# EAGLE board MBO (EAGLE 7.4.0)
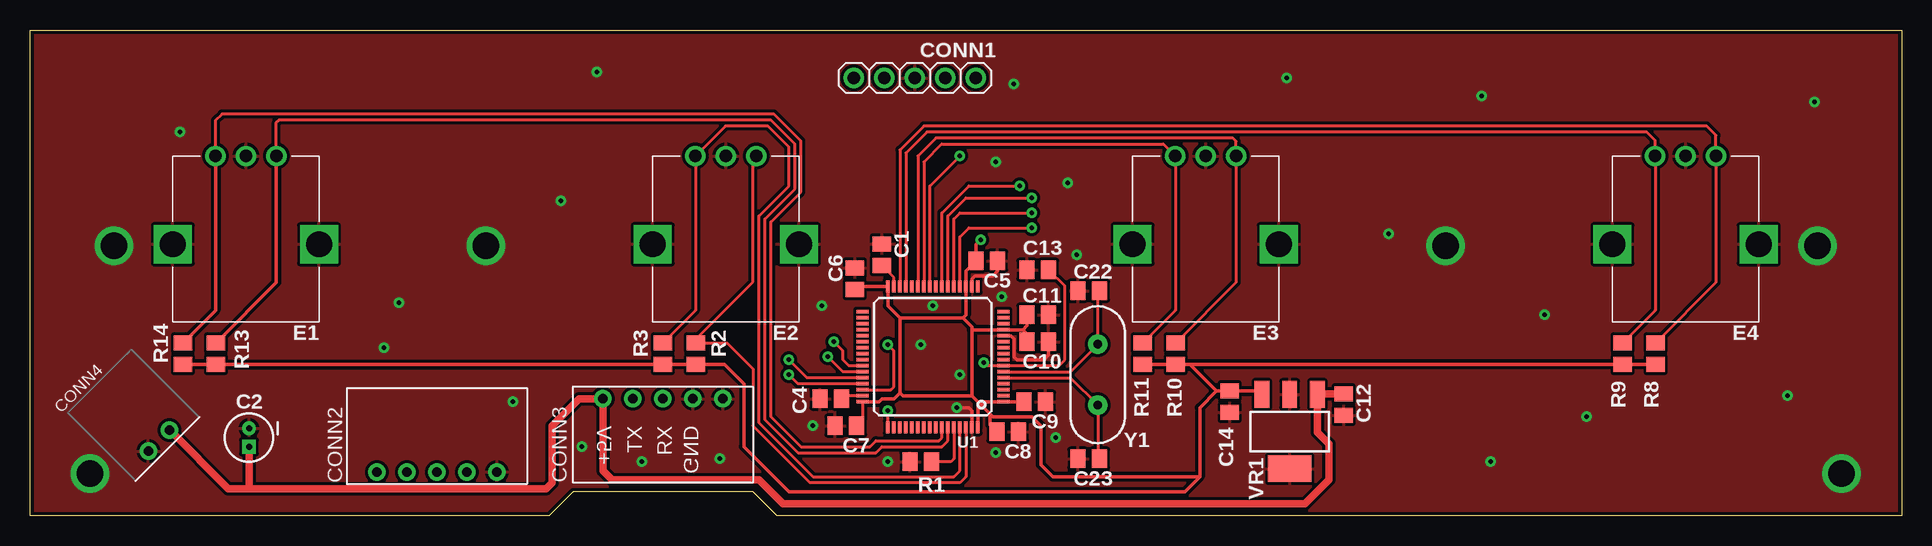
[diagram p0: board, top side]
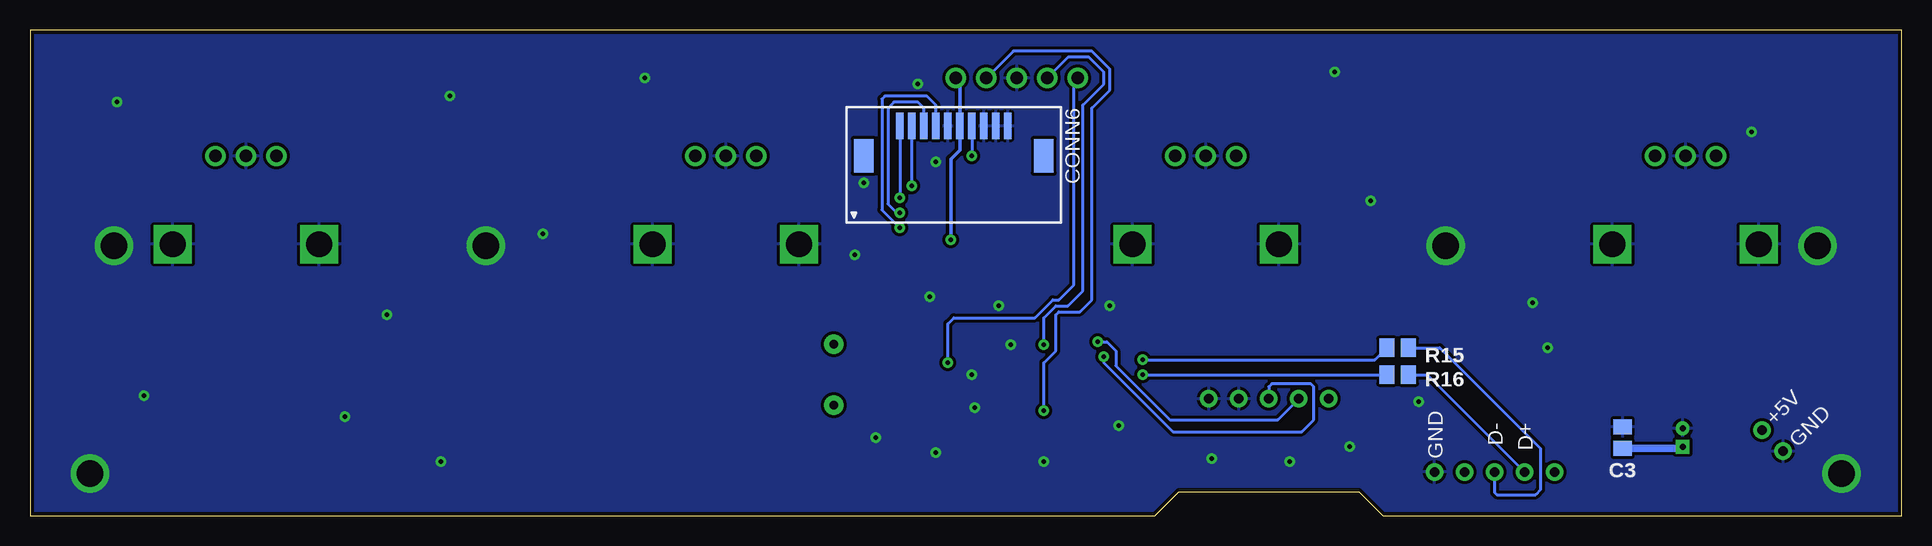
[diagram p1: board, bottom side, seen from below]

Size 156 x 40.5 mm. Coordinates in mm from the lower left corner, seen from the top.
Outline: 156,0 62.25,0 60.25,2 45.25,2 43.25,0 0,0 0,40.5 156,40.5 156,0
Copper layers (1*16): Top 0.035mm / dielectric 1.5mm / Bottom 0.035mm
Design rules "smiery *": minimum track width 8mil, minimum drill 12mil, track to track 7mil, track to pad 5mil, pad to pad 5mil, via to via 6mil, smd to smd 0mil, copper to edge 12mil, drill to drill 10mil, minimum pad ring 13mil, minimum via ring 10mil, stop-mask expansion 2mil, vias tented up to drill 25mil, thermal gap 10mil
Net classes: 0 default: width 0.203 mm; 1 vcc: width 0.254 mm

## Footprints (pad centres in the part's own frame; a part is rotated, then mirrored left to right if it is on the bottom)
C0805 = smd 1.27 x 1.524: 1 -0.9,0; 2 0.9,0
C-TH-E-0401 = drill 0.5 square: + 0.77,0 | drill 0.5: - -0.77,0
1X05-2.54 = drill 1.016: 1 -5.08,0; 2 -2.54,0; 3 0,0; 4 2.54,0; 5 5.08,0
JST-XH-05P-H = drill 0.8: 1 -5,0; 2 -2.5,0; 3 0,0; 4 2.5,0; 5 5,0
JST-XH-02P-H = drill 0.8: 1 -1.25,0; 2 1.25,0
MOLEX-52271-1079 = smd 0.6 x 2.2: 1 -4.5,3.5; 2 -3.5,3.5; 3 -2.5,3.5; 4 -1.5,3.5; 5 -0.5,3.5; 6 0.5,3.5; 7 1.5,3.5; 8 2.5,3.5; 9 3.5,3.5; 10 4.5,3.5 | smd 1.65 x 2.8: S1 -7.5,1; S2 7.5,1
EC12E-1 = drill 1.016: A -2.54,-7.493; B 2.54,-7.493; C 0,-7.493 | drill 2.159 square: S1 -6.096,-0.127; S2 6.096,-0.127
R0805 = smd 1.27 x 1.524: 1 -0.9,0; 2 0.9,0
TQFP-64-10X10-HS = smd 1 x 0.3: 1 -5.875,3.75; 2 -5.875,3.25; 3 -5.875,2.75; 4 -5.875,2.25; 5 -5.875,1.75; 6 -5.875,1.25; 7 -5.875,0.75; 8 -5.875,0.25; 9 -5.875,-0.25; 10 -5.875,-0.75; 11 -5.875,-1.25; 12 -5.875,-1.75; 13 -5.875,-2.25; 14 -5.875,-2.75; 15 -5.875,-3.25; 16 -5.875,-3.75; 33 5.875,-3.75; 34 5.875,-3.25; 35 5.875,-2.75; 36 5.875,-2.25; 37 5.875,-1.75; 38 5.875,-1.25; 39 5.875,-0.75; 40 5.875,-0.25; 41 5.875,0.25; 42 5.875,0.75; 43 5.875,1.25; 44 5.875,1.75; 45 5.875,2.25; 46 5.875,2.75; 47 5.875,3.25; 48 5.875,3.75 | smd 0.3 x 1: 17 -3.75,-5.875; 18 -3.25,-5.875; 19 -2.75,-5.875; 20 -2.25,-5.875; 21 -1.75,-5.875; 22 -1.25,-5.875; 23 -0.75,-5.875; 24 -0.25,-5.875; 25 0.25,-5.875; 26 0.75,-5.875; 27 1.25,-5.875; 28 1.75,-5.875; 29 2.25,-5.875; 30 2.75,-5.875; 31 3.25,-5.875; 32 3.75,-5.875; 49 3.75,5.875; 50 3.25,5.875; 51 2.75,5.875; 52 2.25,5.875; 53 1.75,5.875; 54 1.25,5.875; 55 0.75,5.875; 56 0.25,5.875; 57 -0.25,5.875; 58 -0.75,5.875; 59 -1.25,5.875; 60 -1.75,5.875; 61 -2.25,5.875; 62 -2.75,5.875; 63 -3.25,5.875; 64 -3.75,5.875
SOT223 = smd 2.235 x 1.219: 1 -3.099,2.311; 2 -3.099,0; 3 -3.099,-2.311 | smd 2.2 x 3.6: 4 3.099,0
HC49US = drill 0.7 pad 1.651: 1 -2.54,0; 2 2.54,0

## Placement (x,y rotation side)
C1  2.2u  [C0805]  71,21.75 270 top
C2  10u  [C-TH-E-0401]  18.25,6.5 270 top
C3  100n  [C0805]  23.25,6.5 90 bottom
C4  2.2u  [C0805]  66.75,9.75 180 top
C5  100n  [C0805]  79.75,21.25 0 top
C6  100n  [C0805]  68.75,19.75 90 top
C7  100n  [C0805]  68,7.5 180 top
C8  100n  [C0805]  81.5,7 0 top
C9  100n  [C0805]  83.75,9.5 0 top
C10  1u  [C0805]  84,14.5 0 top
C11  100n  [C0805]  84,16.75 0 top
C12  4.7u  [C0805]  109.5,9.25 270 top
C13  100n  [C0805]  84,20.5 180 top
C14  4.7u  [C0805]  100,9.5 270 top
C22  18p  [C0805]  88.25,18.75 180 top
C23  18p  [C0805]  88.25,4.75 0 top
CONN1  PINHD-1X05-TH-2.54MM  [1X05-2.54]  73.75,36.5 0 top
CONN2  PINHD-1X05-JST-XH-H  [JST-XH-05P-H]  33.92,3.64 0 top
CONN3  PINHD-1X05-JST-XH-H  [JST-XH-05P-H]  52.75,9.75 180 top
CONN4  PINHD-1X02-JST-XH-H  [JST-XH-02P-H]  10.75,6.25 45 top
CONN6  PINHD-1X10-FFC-1MM-Z  [MOLEX-52271-1079]  79,29 0 bottom
E1  ALPS-EC12E24404AX  [EC12E-1]  18,22.5 180 top
E2  ALPS-EC12E24404AX  [EC12E-1]  58,22.5 180 top
E3  ALPS-EC12E24404AX  [EC12E-1]  98,22.5 180 top
E4  ALPS-EC12E24404AX  [EC12E-1]  138,22.5 180 top
R1  510  [R0805]  74.25,4.5 180 top
R2  10k  [R0805]  55.5,13.5 270 top
R3  10k  [R0805]  52.75,13.5 270 top
R8  10k  [R0805]  135.5,13.5 270 top
R9  10k  [R0805]  132.75,13.5 270 top
R10  10k  [R0805]  95.5,13.5 270 top
R11  10k  [R0805]  92.75,13.5 270 top
R13  10k  [R0805]  15.5,13.5 270 top
R14  10k  [R0805]  12.75,13.5 270 top
R15  22  [R0805]  42,14 0 bottom
R16  22  [R0805]  42,11.75 0 bottom
U1  STM32F405RGT6-10X10-HS  [TQFP-64-10X10-HS]  75.25,13.25 180 top
VR1  MCP1825  [SOT223]  105,7 270 top
Y1  16MHz  [HC49US]  89,11.75 270 top

## Library data of the parts
C1-C14 C22 C23 CONN1-CONN4 E1-E4 R1-R3 R8-R11 R13-R16 U1 = igor_lbr
CONN6 = igor_lbr; MANUFACTURER: Molex; MPN: 52271-1079
VR1 = igor_lbr; MANUFACTURER: Microchip; MPN: MCP1825S-3302E/DB
Y1 = igor_lbr; MANUFACTURER: TXC; MPN: 9B-16.000MEEJ-B

## Nets
+3V3: C5.1 C6.1 C7.1 C8.1 C9.1 C10.1 C11.1 C14.1 CONN1.5 CONN6.6 R2.2 R3.2 R8.2 R9.2 R10.2 R11.2 R13.2 R14.2 U1.1 U1.13 U1.19 U1.32 U1.48 U1.64 VR1.3
+5V: C2.+ C3.1 C12.1 CONN3.5 CONN4.2 VR1.1
BOOT0: R1.1 U1.60
BTLDR_BUTTON: U1.41
DISPLAY_RX: CONN3.3 U1.43
DISPLAY_TX: CONN3.4 U1.42
E1A: E1.A R13.1 U1.59
E1B: E1.B R14.1 U1.58
E2A: E2.A R2.1 U1.62
E2B: E2.B R3.1 U1.61
E3A: E3.A R10.1 U1.27
E3B: E3.B R11.1 U1.26
E4A: E4.A R8.1 U1.30
E4B: E4.B R9.1 U1.29
E7A: U1.57
E7B: U1.56
GND: C1.1 C2.- C3.2 C4.2 C5.2 C6.2 C7.2 C8.2 C9.2 C10.2 C11.2 C12.2 C13.2 C14.2 C22.2 C23.1 CONN1.3 CONN2.5 CONN3.1 CONN3.2 CONN4.1 CONN6.5 CONN6.8 CONN6.9 CONN6.10 E1.C E1.S1 E1.S2 E2.C E2.S1 E2.S2 E3.C E3.S1 E3.S2 E4.C E4.S1 E4.S2 R1.2 U1.12 U1.18 U1.63 VR1.2 VR1.4
MUX_COMMON_1: CONN6.7 U1.25
MUX_S0: CONN6.3 U1.21
MUX_S1: CONN6.4 U1.20
MUX_S2: CONN6.2 U1.23
MUX_S3: CONN6.1 U1.22
N$2: C1.2 U1.31
N$3: C4.1 U1.47
NRST: C13.1 CONN1.1 U1.7
OSC_IN: C23.2 U1.5 Y1.2
OSC_OUT: C22.1 U1.6 Y1.1
SWDCLK: CONN1.4 U1.49
SWDIO: CONN1.2 U1.46
USB_DM: R15.1 U1.44
USB_DM_ESD: CONN2.3 R15.2
USB_DP: R16.1 U1.45
USB_DP_ESD: CONN2.2 R16.2

## Tracks (layer width: path | path; a pad name or v marks a point on that pad's centre or on a via)
+3V3  (via drill 0.4 pad 0.6)
  Top 0.254: U1.48 69.38,7.97 C7.1
  Top 0.305: C9.1 U1.1 79.5,9.5 | 97.5,3.25 97.5,9 98.9,10.4 | R8.2 R9.2 R10.2 | R10.2 R11.2 | R14.2 R13.2 R3.2 R2.2 57.9,12.6 59.5,11 59.5,5.75 63.25,2 96.25,2 97.5,3.25 | 97.5,3.25 85.25,3.25 84.25,4.25 84.25,7.5 83.5,8.25 80.25,8.25 80.03,8.47 | 79.5,9 79,9.5 | 78.5,10 72.75,10 72.5,10.25 | 72.5,10.25 72.5,16.5 | 72.5,16.5 77.75,16.5 | 77.75,16.5 78,16.75 U1.19 78,20.4 C5.1 78.85,22.6 v79.25,23 | 77.75,16.5 78.5,15.75 78.5,15.5 | 78.5,15.5 78.5,10 | 79,9.5 79.5,9.5 | 79.5,9.5 79.5,9 | 72.5,16.5 71.5,17.5 U1.32 69.03,19.12 C6.1 | 78.5,15.5 U1.13 82.75,15.5 | U1.64 79,9.5 | 79,9.5 78.5,10 | 80.03,8.47 79.5,9 | 72.5,10.25 72,9.75 71,9.75 70.75,9.5 U1.48 | 80.03,8.47 80.03,7.58 C8.1 | 98.9,10.4 C14.1 102.39,10.4 VR1.3 | R10.2 96.7,12.6 98.9,10.4 | C10.1 83.1,15.15 82.75,15.5 | C11.1 83.1,15.85 82.75,15.5
  Bottom 0.305: v79.25,23 79.25,29.75 78.5,30.5 CONN6.6 78.5,36.17 CONN1.5
+5V
  Top 0.61: C12.1 107.36,10.15 VR1.1 107.31,6.94 108.25,6 108.25,3 106.25,1 62.75,1 60.75,3 48.5,3 47.75,3.75 CONN3.5 45.75,9.75 43.5,7.5 43.5,2.75 43,2.25 18.25,2.25 | 18.25,2.25 16.52,2.25 CONN4.2 | C2.+ 18.25,2.25
  Bottom 0.61: C3.1 18.38,5.6 C2.+
BOOT0
  Top 0.254: U1.60 77,4.75 76.75,4.5 R1.1
DISPLAY_RX  (via drill 0.4 pad 0.6)
  Top 0.254: U1.43 67.75,12 v66.5,13.25
  Bottom 0.254: v66.5,13.25 66.5,12.75 60.75,7 50,7 49,8 49,10.75 49.25,11 52.5,11 52.75,10.75 CONN3.3
DISPLAY_TX  (via drill 0.4 pad 0.6)
  Top 0.254: v67,14.5 67.75,13.75 67.75,13 68.25,12.5 U1.42
  Bottom 0.254: v67,14.5 66.25,14.5 65.5,13.75 65.5,12.5 61,8 52,8 CONN3.4
E1A
  Top 0.254: E1.A 20.54,32.79 20.75,33 61.75,33 63.75,31 63.75,27.25 61.25,24.75 61.25,8 64,5.25 70.5,5.25 71,5.75 76,5.75 76.5,6.25 U1.59
  Top 0.305: E1.A 20.54,19.44 R13.1
E1B
  Top 0.254: E1.B 15.46,32.96 16,33.5 62,33.5 64.25,31.25 64.25,27 61.75,24.5 61.75,8.25 64.25,5.75 70,5.75 70.5,6.25 75.75,6.25 76,6.5 U1.58
  Top 0.305: E1.B 15.46,17.11 R14.1
E2A
  Top 0.254: U1.62 78,3.25 77.5,2.75 65,2.75 60.25,7.5 60.25,12.25 58.15,14.35 55.55,14.35 R2.1 55.5,14.75 60.25,19.5 60.25,29.7 E2.A
E2B
  Top 0.254: U1.61 77.5,3.75 77,3.25 65.25,3.25 60.75,7.75 60.75,25 63.25,27.5 63.25,30.75 61.5,32.5 57.97,32.5 E2.B 55.46,17.11 R3.1
E3A
  Top 0.254: U1.27 74,30 75.5,31.5 100.25,31.5 100.54,31.21 E3.A 100.54,19.44 R10.1
E3B
  Top 0.254: U1.26 74.5,29.5 75.99,30.99 94.46,30.99 E3.B 95.46,17.11 R11.1
E4A
  Top 0.254: U1.30 72.5,30.5 74.5,32.5 139.75,32.5 140.54,31.71 E4.A 140.54,19.44 R8.1
E4B
  Top 0.254: U1.29 73,30.25 74.75,32 134.75,32 135.46,31.29 E4.B 135.46,17.11 R9.1
GND  (via drill 0.4 pad 0.6, 2.2)
  Top 0.305: U1.18 78.5,19.75 78.75,20 80.25,20 80.65,20.4 C5.2 | U1.12 81.75,15 82,14.75 82,13.25 82.25,13 84.5,13 84.9,13.4 C10.2 | U1.63 78.5,8.75 78.25,9 v77.25,9
  other vias: 65.25,7.5 71.5,4.5 80.5,5.25 85.5,6.5 81,18.25 87.25,21.75 75.25,17.5 74.25,14.25 77.5,11.75 113.25,23.5 29.5,14 149,22.5 118,22.5 38,22.5 7,22.5 80.5,29.5 86.5,27.75 5,3.5 151,3.5 82,36 104.75,36.5 121,35 129.75,8.25 30.75,17.75 12.5,32 126.25,16.75 47.25,37 66,17.5 44.25,26.25 121.75,4.5 146.5,10 148.75,34.5 51,4.5 57.5,4.75 46,5.75 40.25,9.5
  pour Bottom (isolate 0.254): 156,0 62.25,0 60.25,2 45.25,2 43.25,0 0,0 0,40.5 156,40.5
  pour Top (isolate 0.254): 156,0 62.25,0 60.25,2 45.25,2 43.25,0 0,0 0,40.5 156,40.5
MUX_COMMON_1  (via drill 0.4 pad 0.6)
  Top 0.254: U1.25 75,27.5 v77.5,30
  Bottom 0.254: CONN6.7 v77.5,30
MUX_S0  (via drill 0.4 pad 0.6)
  Top 0.254: U1.21 77,24.75 77.5,25.25 v83.5,25.25
  Bottom 0.254: CONN6.3 81.5,34 82,34.5 84,34.5 84.5,34 84.5,26 83.75,25.25 v83.5,25.25
MUX_S1  (via drill 0.4 pad 0.6)
  Top 0.254: U1.20 77.5,23.25 78.25,24 v83.5,24
  Bottom 0.254: CONN6.4 80.5,34.25 81.25,35 84.75,35 85,34.75 85,25.5 v83.5,24
MUX_S2  (via drill 0.4 pad 0.6)
  Top 0.254: U1.23 76,25.25 78.25,27.5 v82.5,27.5
  Bottom 0.254: v82.5,27.5 CONN6.2
MUX_S3  (via drill 0.4 pad 0.6)
  Top 0.254: U1.22 76.5,25 78,26.5 v83.5,26.5
  Bottom 0.254: CONN6.1 v83.5,26.5
N$2
  Top 0.254: U1.31 72,19.85 C1.2
N$3
  Top 0.254: U1.47 67.9,10 C4.1
NRST  (via drill 0.4 pad 0.6)
  Top 0.254: v79.5,12.75 79.75,12.5 U1.7 85.75,12.5 86.25,13 86.25,19.15 C13.1
  Bottom 0.254: v79.5,12.75 79.5,16 79,16.5 72.25,16.5 70.75,18 70.25,18 69,19.25 69,36.17 CONN1.1
OSC_IN
  Top 0.254: U1.5 86.71,11.5 Y1.2 89,4.9 C23.2
OSC_OUT
  Top 0.254: U1.6 86.71,12 Y1.1 89,18.6 C22.1
SWDCLK  (via drill 0.4 pad 0.6)
  Top 0.254: U1.49 v71.5,8.75
  Bottom 0.254: v71.5,8.75 71.5,12.75 70.5,13.75 70.5,16.75 70.25,17 68.5,17 67.5,18 67.5,34 66,35.5 66,37.25 67.5,38.75 74.04,38.75 CONN1.4
SWDIO  (via drill 0.4 pad 0.6)
  Top 0.254: U1.46 71.75,10.5 72,10.75 72,13.75 v71.5,14.25
  Bottom 0.254: v71.5,14.25 71.5,16.5 70.5,17.5 69.5,17.5 68.25,18.75 68.25,34.25 66.5,36 66.5,37 67.75,38.25 69.46,38.25 CONN1.2
USB_DM  (via drill 0.4 pad 0.6)
  Top 0.254: U1.44 64.75,11.5 v63.25,13
  Bottom 0.254: v63.25,13 43.9,13 R15.1
USB_DM_ESD
  Bottom 0.254: R15.2 38.5,14 30.25,5.75 30.25,5.74 30.1,5.59 30.1,2.15 30.5,1.75 33.75,1.75 33.92,1.92 CONN2.3
USB_DP  (via drill 0.4 pad 0.6)
  Top 0.254: U1.45 64,11 v63.25,11.75
  Bottom 0.254: v63.25,11.75 R16.1
USB_DP_ESD
  Bottom 0.254: R16.2 39.53,11.75 CONN2.2

## Text on the board
tNames: +5V | TX | RX | GND
bNames: GND | D+ | D- | +5V | GND